# Altium PCB MI_06_MCU_Rev_3_0.PcbDoc
Units mm, origin at the board's own origin, x right, y up, seen from the top; angles counter-clockwise.
Board outline 64.5 x 65 mm, 2 copper layers (Top Layer, Bottom Layer), stack 2.071 mm thick; 43 components, 27 nets, 143 pads, 0 vias.
Unrouted connection lines stored in the file: 6.
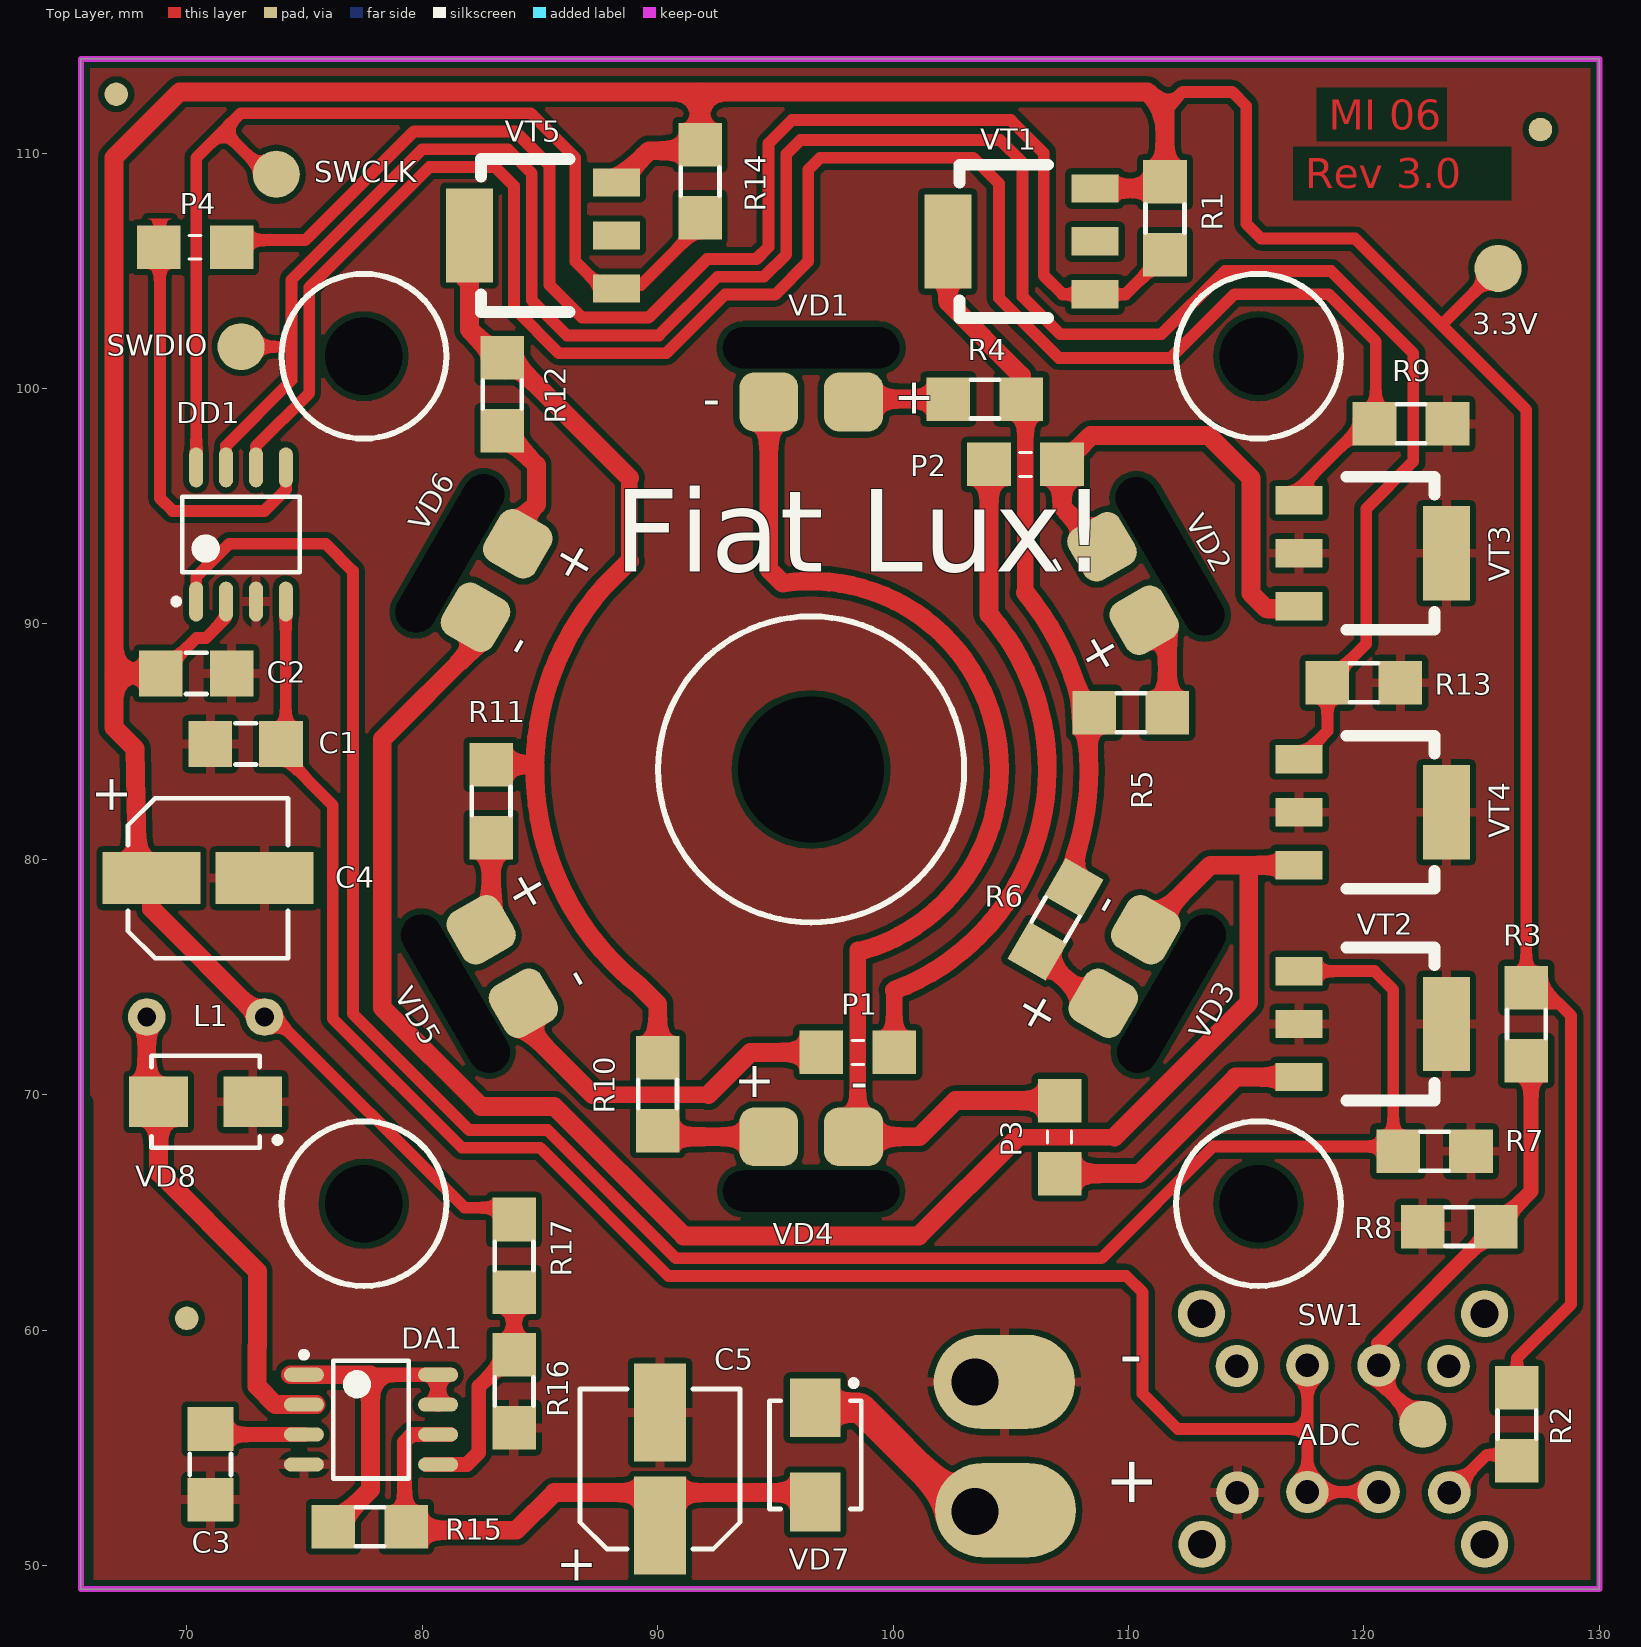
[diagram p0: Top Layer view]
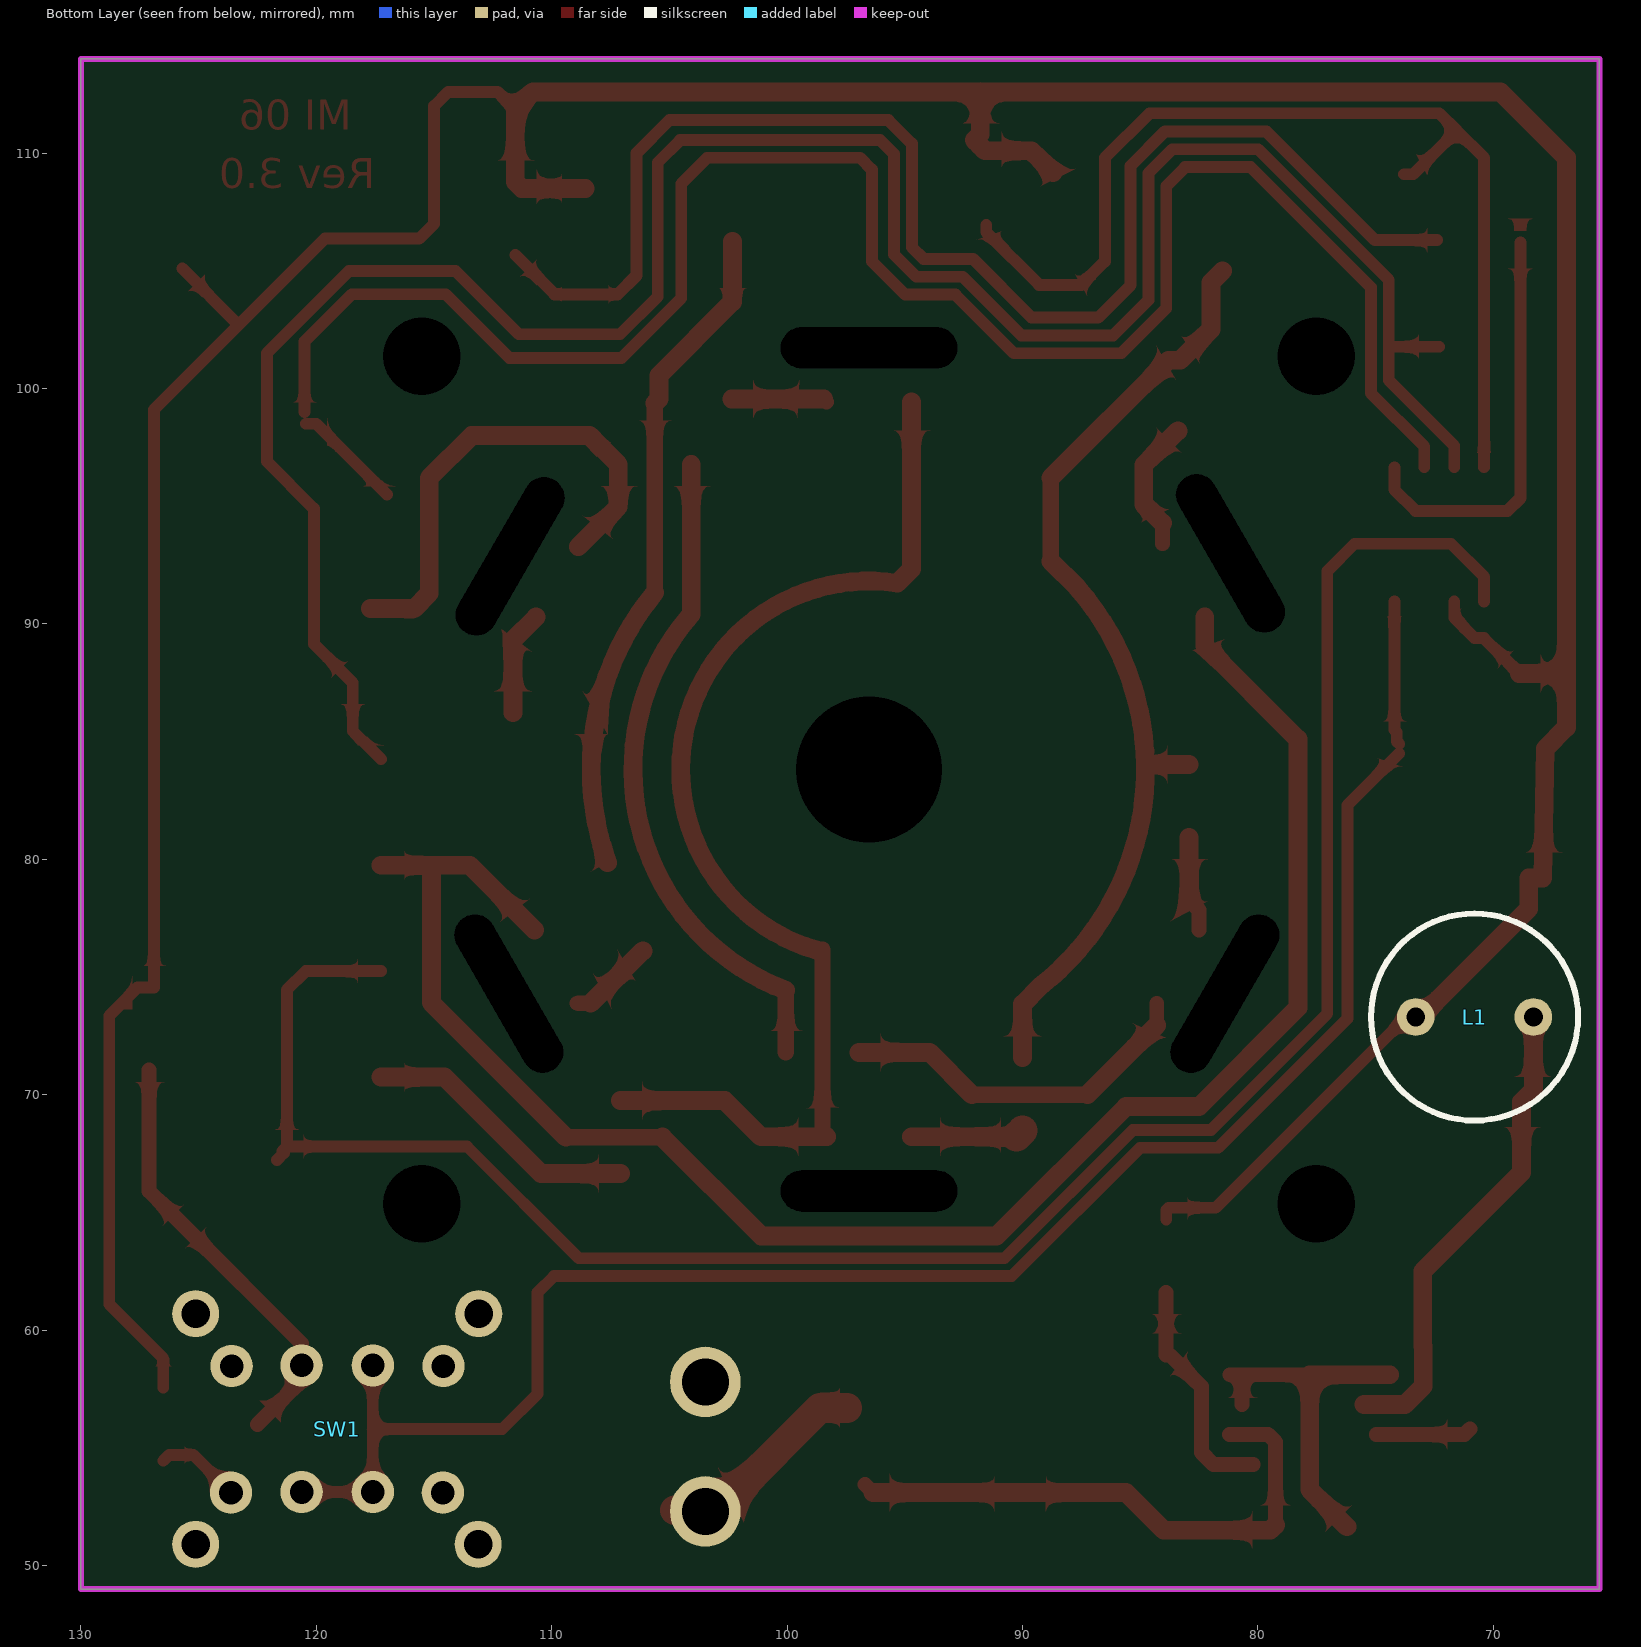
[diagram p1: Bottom Layer view, seen from below]
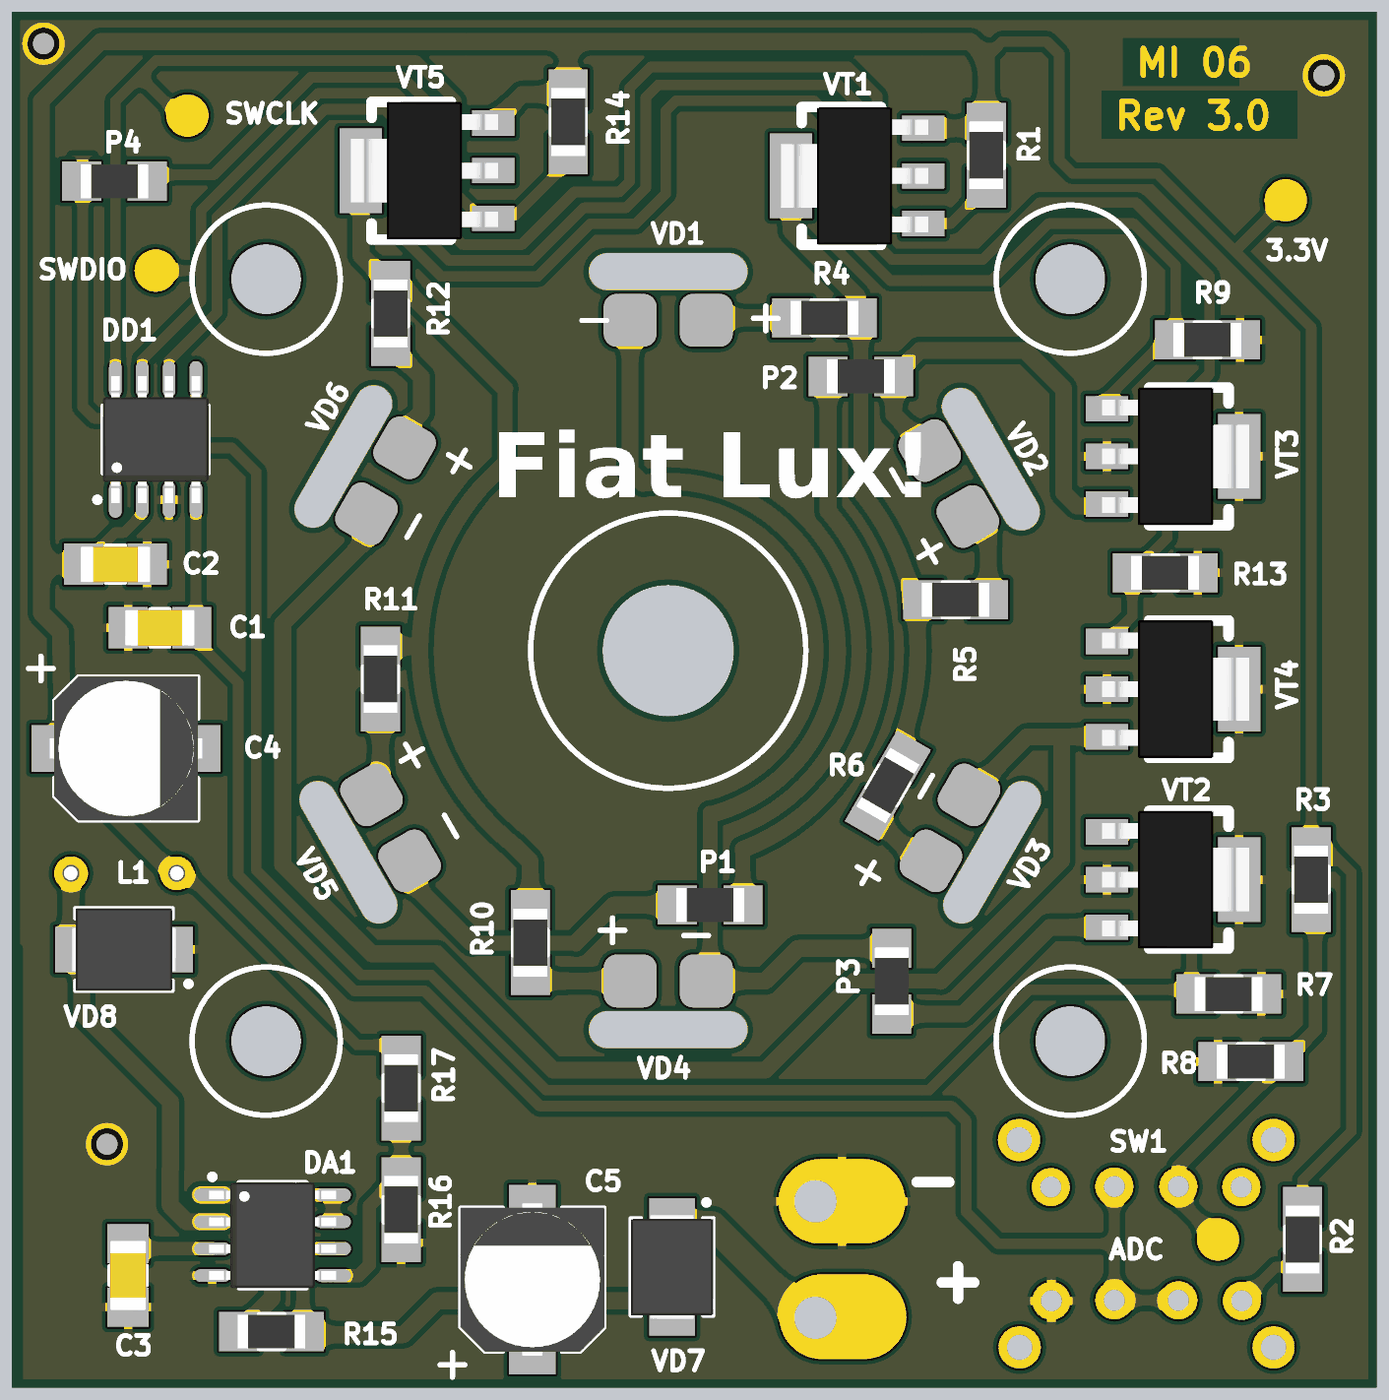
[diagram p2: 3D render of the assembled board from above, using the file's embedded part models]

## Layer stack, top to bottom
Top Solder: solder mask 0.0102, Solder Resist, Dk 3.5
Top Layer: signal copper 0.0356
Dielectric 1: dielectric 2, FR-4, Dk 4.8
Bottom Layer: signal copper 0.0356
Bottom Solder: solder mask 0.0102, Solder Resist, Dk 3.5

## Board outline
65.5,49 130,49 130,114 65.5,114

## Design rules (kind name [scope] priority, off if disabled: settings)
Clearance [All] p1: gap=0.254 ignorepadtopadclearanceinfootprint=FALSE except(0: Arc-Hole Track-Hole SMDPad-Hole THPad-Hole Via-Hole Fill-Hole Poly-Hole Region-Hole Text-Hole; 0.076: SMDPad-SMDPad SMDPad-THPad SMDPad-Via)
ComponentClearance [All] p1: gap=0.001 collisioncheckmode=3 verticalgap=0.254 showdistances=FALSE
PolygonConnect [All] p1: connectstyle=Relief reliefconductorwidth=0.4 reliefentries=4 polygonreliefangle="90 Angle" airgapwidth=0.254
RoutingVias [All] p1: holewidth=0.711 width=1.27 viastyle="Through Hole" minholewidth=0.711 minwidth=1.27 maxholewidth=0.711 maxwidth=1.27
SolderMaskExpansion [All] p1: expansion=0.102
Width [All] p1: maxlimit=2.54 minlimit=0.025 preferedwidth=0.8 checkconnectedcopper=TRUE
29 further rules are at their usual default settings.

## Classes and differential pairs
component class MI_06_07_08_MCU_Rev_3_0: C1 C2 C3 C4 C5 DA1 DD1 L1 R1 R2 R3 R4 R5 R6 R7 R8 R9 R10 R11 R12 R13 R14 R15 R16 R17 SW1 VD1 VD2 VD3 VD4 VD5 VD6 VD7 VD8 VT1 VT2 VT3 VT4 VT5

## Components (designator, comment, footprint, x,y, rotation, side; value= is the part's Value field where it differs from the comment)
C1 "Capacitor" CAP1206 72.5,84.9 r0 top value="0.1 uF"
C2 "Capacitor" CAP1206 70.4,87.9 r180 top value="0.1 uF"
C3 "Capacitor" CAP1206 71,54.3 r90 top value="470 pF"
C4 "Capacitor_Polar" CAP6.3x7.7 70.9,79.2 r0 top value=100uF
C5 "Capacitor_Polar" CAP6.3x7.7 90.1,54.1 r90 top value=100uF
DA1 "MC34063" SOIC-8 77.825,56.2 r0 top value=MC34063ACD-TR
DD1 "STM32G030J6" SOIC-8 72.3,93.8 r90 top
L1 "inductor" inductor0912 70.8,73.3 r0 bottom value="RLB0914-221KL, 220 uH"
P1 "Comment" RES1206 98.5,71.8 r0 top
P2 "Comment" RES1206 105.625,96.775 r0 top
P3 "Comment" RES1206 107.075,68.2 r90 top
P4 "Comment" RES1206 70.35,106 r0 top
R1 "Resistor" RES1206 111.55,107.225 r90 top value="10 kOm"
R2 "Resistor" RES1206 126.5,56 r270 top value="10 kOm"
R3 "Resistor" RES1206 126.9,73 r270 top value="10 kOm"
R4 "Resistor" RES1206 103.9,99.55 r180 top value="5.1 Om"
R5 "Resistor" RES1206 110.1,86.225 r0 top value="5.1 Om"
R6 "Resistor" RES1206 106.9,77.45 r240 top value="5.1 Om"
R7 "Resistor" RES1206 123,67.6 r0 top value="10 kOm"
R8 "Resistor" RES1206 124.05,64.4 r180 top value="10 kOm"
R9 "Resistor" RES1206 122,98.5 r0 top value="10 kOm"
R10 "Resistor" RES1206 90,70.025 r90 top value="5.1 Om"
R11 "Resistor" RES1206 82.925,82.475 r90 top value="5.1 Om"
R12 "Resistor" RES1206 83.4,99.75 r90 top value="5.1 Om"
R13 "Resistor" RES1206 120,87.5 r0 top value="10 kOm"
R14 "Resistor" RES1206 91.8,108.8 r90 top value="10 kOm"
R15 "Resistor" RES1206 77.775,51.65 r0 top value="0.33 Om"
R16 "Resistor" RES1206 83.9,57.4 r270 top value="10 kOm"
R17 "Resistor" RES1206 83.9,63.15 r90 top value="16 kOm"
SW1 "slide switch" "SLIDE SWITCH" 119.1,55.8 r180 bottom
VD1 "LED" LED_MAJAK 96.52,101.727 r0 top
VD2 "LED" LED_MAJAK 111.767,92.866 r300 top
VD3 "LED" LED_MAJAK 111.825,74.295 r240 top
VD4 "LED" LED_MAJAK 96.52,65.913 r180 top
VD5 "LED" LED_MAJAK 81.407,74.295 r120 top
VD6 "LED" LED_MAJAK 81.17,92.995 r60 top
VD7 "Diode" SMB 96.7,54.7 r270 top value=SS210
VD8 "Diode" SMB 70.8,69.7 r180 top value=SS210
VT1 "MOSFET-P" SOT223 105.325,106.25 r90 top value=IRFL9014TRPBF
VT2 "MOSFET-N" SOT223 120.5,73 r270 top value=IRLL024NPBF
VT3 "MOSFET-N" SOT223 120.5,93 r270 top value=IRLL024NPBF
VT4 "MOSFET-N" SOT223 120.5,82 r270 top value=IRLL024NPBF
VT5 "MOSFET-P" SOT223 85,106.5 r90 top value=IRFL9014TRPBF

## Footprints (in the part's own frame and the unit in brackets; to place one, negate y for a bottom-side part, rotate by r counter-clockwise, add the part's x,y. Pads: shape width x height; smd on the part's side, far side on the other; paste and mask are expansions set on the pad)
CAP6.3x7.7 [mm]
  rect 4.15x2.2 smd: 1(-2.4,0) 2(2.4,0)
  silkscreen extent -3.4,-3.4 3.4,3.4, body extent -3.6,-3.4 3.6,3.4, height 7.7
CAP1206 [mm]
  rect 1.85x1.95 smd: 1(-1.5,0) 2(1.5,0)
  silkscreen extent -0.45,-0.87 0.45,0.87, body extent -1.65,-0.85 1.65,0.85, height 1.5
inductor0912 [mm]
  round 1.6 hole 0.8: 1(-2.5,0) 2(2.5,0)
  silkscreen extent -4.4,-4.4 4.4,4.4, body extent -4.35,-4.35 4.35,4.35, height 11
LED_MAJAK [mm]
  round 0 hole 1.75 slot 7.5 at 0 deg: 0(0,0)
  rrect50% 2.5x2.5 smd: 1(-1.8,-2.3) 2(1.8,-2.3)
RES1206 [mm] "Chip Resistor, 2-Leads, Body 3,20x1,60mm, IPC Medium Density"
  rect 1.85x1.85 smd: 1(-1.55,0) 2(1.55,0)
  silkscreen extent -0.25,-0.51 0.25,0.51, body extent -1.6,-0.8 1.6,0.8, height 0.6
"SLIDE SWITCH" [mm]
  round 2 hole 1.2: 0(-6.025,4.9) 0(-6.025,-4.9) 0(5.975,-4.9) 0(6,4.9)
  round 1.8 hole 1: 1(-4.525,-2.7) 2(-1.525,-2.675) 3(1.5,-2.675) 4(4.475,-2.7) 5(4.5,2.675) 6(1.5,2.7) 7(-1.525,2.7) 8(-4.5,2.675)
  body extent -6.9,-5 6.9,5, height 16
SMB [mm] "Molded Diode, 2-Leads, Body 4,29x3,60mm, IPC Medium Density"
  rect 2.5x2.15 smd: 1(-2,0) 2(2,0)
  silkscreen extent -3.17,-1.95 2.3,1.95, body extent -2.5,-1.95 2.51,1.95, height 2.2
SOIC-8 [mm] "SOIC, 8-Leads, Body 4,90x3,90mm, Pitch 1,27mm, IPC Medium Density"
  oval 1.7x0.6 smd: 1(-2.85,1.905) 2(-2.85,0.635) 3(-2.85,-0.635) 4(-2.85,-1.905) 5(2.85,-1.905) 6(2.85,-0.635) 7(2.85,0.635) 8(2.85,1.905)
  silkscreen extent -2.97,-2.5 1.6,2.88, body extent -3,-2.5 3,2.5, height 1.75
SOT223 [mm]
  rect 1.2x2 smd: 1(-2.25,-3.25) 2(0,-3.25) 3(2.25,-3.25)
  rect 4x2 smd: 2(0,3)
  silkscreen extent -3.25,-1.25 3.25,2.5, body extent -3.25,-3.48 3.25,3.48, height 1.7

## Free pads (board coordinates)
  round 0 / inner round 3.3 / far side round 0 hole 3.3 unplated mask-25.4: 0(77.52,65.37) 0(77.52,101.37) 0(115.52,65.37) 0(115.52,101.37)
  round 0 hole 6.2 unplated: 0(96.52,83.82)
  round 1 smd: 5(67,112.5) 5(70,60.5) 5(127.5,111)
  round 2 on Top Solder: 7(67,112.5) 7(70,60.5) 7(127.5,111)
  oval 6x4 smd paste-5: 11(104.725,57.8) 11(104.775,52.35)
  round 2 smd paste-3: 12(72.304,101.777) 12(73.8,109.1) 12(122.5,56) 12(125.7,105.1)
  round 3 hole 2: 13(103.475,52.3) 13(103.475,57.8)

## Nets (pads, with @x,y where several pads share a name; then routed paths per layer and width w, separated by ;. In a path a pad name is that pad's centre, name@x,y a point inside that pad or via, vN(x,y) a via of type N, cw(c..) or ccw(c..) an arc to the next point about the centre after c; other vN are vias at no path point)
3.3V: C2.2 C4.1 DD1.2 L1.2 pad.12@125.7,105.1 R1.2 R2.1 R3.1 R14.2 R17.2 VT1.3 VT5.3 | length 190.1
  Top Layer w0.5: C2.2 70.4,89.4 70.8,89.4 71.665,90.265 DD1.2 ; L1.2@73.1,73.3 L1.2 73.7,73.3 81.8,65.2 83.8,65.2 83.9,65.1 R17.2 ; 111.55,111.85 112.3,112.6 114.4,112.6 115,112 115,107 115.633,106.367 119.633,106.367 123.25,102.75 ; pad.12@125.7,105.1 123.35,102.75 123.25,102.75 ; R2.1 126.5,58.8 128.8,61.1 128.8,73.35 127.6,74.55 R3.1 126.9,99.1 123.25,102.75
  Top Layer w0.8: C2.2 66.9,87.9 ; L1.2@73.1,73.3 68.5,77.9 C4.1 67.9,79.2 67.8,84.7 66.9,85.6 66.9,87.9 ; VT5.3@88.7,109.175 89.625,110.1 91.6,110.1 91.825,110.325 92.05,110.55 91.8,110.8 91.8,112.6 ; VT1.3 111.275,108.5 R1.2 111.55,111.85 110.8,112.6 91.8,112.6 ; 66.9,87.9 66.9,109.8 69.7,112.6 91.8,112.6
12V: pad.11@104.775,52.35 pad.13@103.475,52.3 VD7.1 | length 8.7
  Top Layer w1.27: VD7.1@97.45,56.7 98.6,56.7 102.25,53.05 pad.13@103.45,53.05 ; pad.13@103.55,52.35 pad.13@104.775,52.35
GND: C1.1 C2.1 C3.1 C4.2 C5.2 DA1.4 DD1.3 pad.11@104.725,57.8 pad.13@103.475,57.8 R7.2 R8.2 R9.2 R13.2 R16.2 SW1.4 VD8.1 VT2.2 VT3.2 VT4.2
NetC1_2: C1.2 DD1.4 SW1.2 SW1.3 SW1.6 | length 77.9
  Top Layer w0.5: C1.2@74,84.5 76.2,82.3 76.2,73.234 81.688,67.746 85.009,67.746 90.455,62.3 109.9,62.3 110.6,61.6 110.6,57.3 112.1,55.8 117.6,55.8 ; C1.2 74.1,85 74.1,85.4 74.205,85.505 DD1.4 ; SW1.6 117.6,55.8 ; SW1.2 SW1.3 117.6,55.8
NetC3_2: C3.2 DA1.3 | length 4.1
  Top Layer w0.635: C3.2 71.235,55.565 DA1.3
NetC5_1: C5.1 DA1.6 R15.2 VD7.2 | length 24
  Top Layer w0.635: R15.2@79.253,51.722 79.253,55.253 79.565,55.565 DA1.6 DA1.6@81.2,55.565 ; VD7.2@96.35,53.1 VD7.2@96.7,53.45
  Top Layer w0.8: R15.2@79.253,51.722 R15.2 79.475,51.5 84,51.5 85.6,53.1 VD7.2@96.35,53.1
NetDA1_1: DA1.1 DA1.7 DA1.8 R15.1 | length 15.2
  Top Layer w0.635: 77.8,58.105 DA1.8 ; DA1.7 DA1.8 ; DA1.8@81.195,58.105 DA1.8
  Top Layer w0.8: DA1.1@74.4,58.105 DA1.1 77.8,58.105 77.8,53.225 R15.1
NetDA1_2: DA1.2 L1.1 VD8.2 | length 20.5
  Top Layer w0.8: L1.1 68.3,70.2 VD8.2 68.8,66.7 73,62.5 73,59.3 72.981,59.319 72.981,57.619 73.765,56.835 DA1.2 DA1.2@75.5,56.835
NetDA1_5: DA1.5 R16.1 R17.1 | length 9.9
  Top Layer w0.635: DA1.5@80.2,54.295 DA1.5 81.895,54.295 82.4,54.8 82.4,57.6 83.75,58.95 R16.1 R17.1
NetDD1_1: DD1.1 R7.1 VT2.1 | length 89.6
  Top Layer w0.5: DD1.1 70.395,91.995 71.8,93.4 75.9,93.4 77.054,92.246 77.054,73.446 82,68.5 85.322,68.5 90.768,63.054 108.854,63.054 113.6,67.8 R7.1@121.1,67.8 ; VT2.1 119.65,75.25 120.45,75.25 121.25,74.45 121.25,67.8 R7.1 ; R7.1@121.375,67.525 R7.1@121.675,67.225
NetDD1_5: DD1.5 P4.1 P4.2 R1.1 VT1.1 | length 77.9
  Top Layer w0.508: P4.1@68.85,106.2 68.85,95.35 69.4,94.8 73.3,94.8 74.205,95.705 DD1.5 ; P4.2@72.4,106.3 75.028,106.3 79.644,110.916 83.956,110.916 85.412,109.46 85.412,104.388 86.788,103.012 89.612,103.012 92.1,105.5 94.2,105.5 94.7,106 94.7,110.4 95.7,111.4 105,111.4 106.4,110 106.4,104.8 107.2,104 VT1.1 109.875,104 R1.1
NetDD1_6: DD1.6 R9.1 VT3.1 | length 84.1
  Top Layer w0.5: DD1.6 72.935,97.538 75.2,99.803 75.2,104.3 80.304,109.404 83.096,109.404 83.9,108.6 83.9,103.4 85.8,101.5 90.366,101.5 92.854,103.988 94.988,103.988 96.4,105.4 96.4,109.3 96.9,109.8 103.4,109.8 104.5,108.7 104.5,103.834 107.034,101.3 111.8,101.3 114.5,104 118.5,104 120.5,102 R9.1@120.5,99 ; VT3.1@117,95.5 120,98.5 R9.1
NetDD1_7: DD1.7 pad.12@72.304,101.777 R13.1 VT4.1 | length 102.2
  Top Layer w0.5: DD1.7 71.665,97.565 74.446,100.346 74.446,101.9 ; pad.12@72.304,101.777 74.323,101.777 74.446,101.9 ; VT4.1 118.45,85.45 R13.1 120.1,89.15 120.1,94.9 122.1,96.9 122.1,101.5 118.614,104.986 114.086,104.986 111.4,102.3 107.1,102.3 105.5,103.9 105.5,109.6 104.546,110.554 96.054,110.554 95.458,109.958 95.458,105.686 94.514,104.742 92.542,104.742 90.054,102.254 86.146,102.254 84.654,103.746 84.654,109.146 83.642,110.158 79.992,110.158 74.446,104.612 74.446,101.9
NetDD1_8: DD1.8 pad.12@73.8,109.1 R14.1 VT5.1 | length 44.9
  Top Layer w0.5: DD1.8 70.395,109.795 71.55,110.95 ; pad.12@73.8,109.1 73.4,109.1 71.55,110.95 ; R14.1@91.542,106.942 91.542,106.642 89.3,104.4 87.496,104.4 86.5,105.396 86.5,109.8 84.604,111.696 72.296,111.696 71.55,110.95
NetR2_2: R2.2 SW1.1 | length 3.6
  Top Layer w0.5: SW1.1 125.225,54.7 126.25,54.7 R2.2
NetR3_2: pad.12@122.5,56 R3.2 R8.1 SW1.7 | length 18.5
  Top Layer w0.635: pad.12@122.5,56 120.625,57.875 SW1.7 120.625,59.425 R8.1 127.1,65.9 R3.2@127.1,71.05
NetR4_1: R4.1 R5.1 R6.1 VT1.2 | length 28.5
  Top Layer w0.7: 105.624,91.329 R4.1@105.624,99.376
  Top Layer w0.8: VT1.2@102.325,106.25 102.325,103.675 105.45,100.55 R4.1 R4.1@105.624,99.376 ; 105.624,91.329 cw(c96.52,83.82) R6.1@107.635,79.852
NetR4_2: R4.2 VD1.2 | length 4.1
  Top Layer w0.635: VD1.2 VD1.2@98.443,99.55
  Top Layer w0.8: VD1.2@98.443,99.55 R4.2
NetR5_2: R5.2 VD2.2 | length 4.5
  Top Layer w0.8: VD2.2@110.668,90.286 111.65,89.304 R5.2
NetR6_2: R6.2 VD3.2 | length 3.7
  Top Layer w0.635: VD3.2@108.347,73.886 VD3.2
  Top Layer w0.8: R6.2 VD3.2@108.347,73.886
NetR10_1: R10.1 VD4.2 | length 4.8
  Top Layer w0.8: R10.1@90.262,68.213 VD4.2
  Top Layer w1.27: R10.1 R10.1@90.262,68.213
NetR10_2: R10.2 R11.2 R12.2 VT5.2 | length 41.5
  Top Layer w0.635: 84.758,84.025 84.782,84.001
  Top Layer w0.7: 88.8,92.662 88.8,96.2
  Top Layer w0.8: VT5.2@81.5,105 82,104.5 82,102.5 83.3,101.2 83.8,101.2 88.8,96.2 ; R11.2 84.758,84.025 ; 88.8,92.662 87.665,91.527 ccw(c96.52,83.82) 84.782,84.001 ccw(c96.52,83.82) 89.247,74.605 90,73.852 R10.2
NetR11_1: R11.1 VD5.2 | length 4.1
  Top Layer w0.635: VD5.2 82.499,77.849 VD5.2@82.925,78.275
  Top Layer w0.8: VD5.2@82.925,78.275 R11.1
NetR12_1: R12.1 VD6.2 | length 5.7
  Top Layer w0.635: VD6.2 VD6.2@84.062,94.287
  Top Layer w0.8: R12.1 84.85,96.75 84.85,95.075 VD6.2@84.062,94.287
NetVD1_1: P3.1 P3.2 VD1.1 VD4.1 VT2.3 | length 61.3
  Top Layer w0.7: VD4.1@98.498,68.391 98.498,76.15
  Top Layer w0.8: VD1.1 94.72,92.329 95.319,91.729 cw(c96.52,83.82) 98.764,76.141 ; VD4.1@98.498,68.391 VD4.1 101.113,68.213 102.65,69.75 P3.2 ; P3.1 110.45,66.65 114.55,70.75 VT2.3
NetVD2_1: P1.1 P1.2 P2.1 P2.2 VD2.1 VD5.1 VT3.3 | length 65
  Top Layer w0.635: VD5.1@84.299,72.949 VD5.1
  Top Layer w0.7: 87.244,70.004 92.154,70.004 ; P1.2 100.05,74.426 100.059,74.434 ; 104.075,90.402 104.174,90.303
  Top Layer w0.8: VD5.1@84.299,72.949 87.244,70.004 ; 92.154,70.004 93.95,71.8 P1.1 ; 100.059,74.434 ccw(c96.52,83.82) 104.174,90.303 ; 104.075,90.402 P2.1 ; VD2.1 107.175,94.975 P2.2 108.4,98 113.4,98 115.2,96.2 115.2,91.3 115.85,90.65 VT3.3@117.7,90.65
NetVD3_1: VD3.1 VD6.1 VT4.3 | length 76.6
  Top Layer w0.7: 105.3,68.2 109.4,68.2
  Top Layer w0.8: VD6.1 82.262,89.062 78.304,85.104 78.304,73.696 82.5,69.5 85.6,69.5 91.1,64 101.1,64 105.3,68.2 ; 109.4,68.2 115.112,73.912 115.112,79.7 ; VD3.1 113.479,79.75 VT4.3
pads on no net: SW1.0 SW1.5 SW1.8 VD1.0 VD2.0 VD3.0 VD4.0 VD5.0 VD6.0

## Polygon pours and split planes (outlines as drawn)
GND on Top Layer "Bottom Layer-No Net 1" (solid, pour order 0): 65.5,49 65.5,114 130,114 130,49

## Keep-outs
Keep-Out Layer:
  lines w0.254: 65.5,49 65.5,61.991 65.5,69.842 65.5,114 130,114 130,49 65.5,49

## Other copper
Top Layer:
  text "MI 06" at 118.5,111 h1.27
  text "Rev 3.0" at 117.5,108.5 h1.27

## Silkscreen, mask and mechanical layers (free items; w line width, h text height)
Top Overlay:
  circle w0.254: c96.52,83.82 r6.5
  circle w0.254: c115.52,65.37 r3.5
  circle w0.254: c77.52,65.37 r3.5
  circle w0.254: c115.52,101.37 r3.5
  circle w0.254: c77.52,101.37 r3.5
  text "SWCLK" at 75.416,108.77 h0.9
  text "3.3V" at 124.6,102.3 h0.9
  text "SWDIO" at 66.6,101.4 h0.9
  text "Fiat Lux!" at 88.145,91.07 h6
  text "-" at 110.6,59.5 h2 r180
  text "ADC" at 117.2,55.1 h0.9
  text "+" at 111,52.4 h2 r90
Top Solder:
  region: 115.52,67.128 115.177,67.095 114.847,66.995 114.543,66.832 114.277,66.613 114.058,66.347 113.895,66.043 113.795,65.713 113.762,65.37 113.795,65.027 113.895,64.697 114.058,64.393 114.277,64.127 114.543,63.908 114.847,63.745 115.177,63.645 115.52,63.612 115.863,63.645 116.193,63.745 116.497,63.908 116.763,64.127 116.982,64.393 117.145,64.697 117.245,65.027 117.278,65.37 117.245,65.713 117.145,66.043 116.982,66.347 116.763,66.613 116.497,66.832 116.193,66.995 115.863,67.095 115.52,67.128
  region: 77.52,103.128 77.177,103.095 76.847,102.995 76.543,102.832 76.277,102.613 76.058,102.347 75.895,102.043 75.795,101.713 75.762,101.37 75.795,101.027 75.895,100.697 76.058,100.393 76.277,100.127 76.543,99.908 76.847,99.745 77.177,99.645 77.52,99.612 77.863,99.645 78.193,99.745 78.497,99.908 78.763,100.127 78.982,100.393 79.145,100.697 79.245,101.027 79.278,101.37 79.245,101.713 79.145,102.043 78.982,102.347 78.763,102.613 78.497,102.832 78.193,102.995 77.863,103.095 77.52,103.128
  region: 115.52,103.128 115.177,103.095 114.847,102.995 114.543,102.832 114.277,102.613 114.058,102.347 113.895,102.043 113.795,101.713 113.762,101.37 113.795,101.027 113.895,100.697 114.058,100.393 114.277,100.127 114.543,99.908 114.847,99.745 115.177,99.645 115.52,99.612 115.863,99.645 116.193,99.745 116.497,99.908 116.763,100.127 116.982,100.393 117.145,100.697 117.245,101.027 117.278,101.37 117.245,101.713 117.145,102.043 116.982,102.347 116.763,102.613 116.497,102.832 116.193,102.995 115.863,103.095 115.52,103.128
  region: 77.52,67.128 77.177,67.095 76.847,66.995 76.543,66.832 76.277,66.613 76.058,66.347 75.895,66.043 75.795,65.713 75.762,65.37 75.795,65.027 75.895,64.697 76.058,64.393 76.277,64.127 76.543,63.908 76.847,63.745 77.177,63.645 77.52,63.612 77.863,63.645 78.193,63.745 78.497,63.908 78.763,64.127 78.982,64.393 79.145,64.697 79.245,65.027 79.278,65.37 79.245,65.713 79.145,66.043 78.982,66.347 78.763,66.613 78.497,66.832 78.193,66.995 77.863,67.095 77.52,67.128
  text "MI 06" at 118.5,111 h1.27
  text "Rev 3.0" at 117.5,108.5 h1.27
Bottom Solder:
  region: 115.52,67.128 115.177,67.095 114.847,66.995 114.543,66.832 114.277,66.613 114.058,66.347 113.895,66.043 113.795,65.713 113.762,65.37 113.795,65.027 113.895,64.697 114.058,64.393 114.277,64.127 114.543,63.908 114.847,63.745 115.177,63.645 115.52,63.612 115.863,63.645 116.193,63.745 116.497,63.908 116.763,64.127 116.982,64.393 117.145,64.697 117.245,65.027 117.278,65.37 117.245,65.713 117.145,66.043 116.982,66.347 116.763,66.613 116.497,66.832 116.193,66.995 115.863,67.095 115.52,67.128
  region: 77.52,103.128 77.177,103.095 76.847,102.995 76.543,102.832 76.277,102.613 76.058,102.347 75.895,102.043 75.795,101.713 75.762,101.37 75.795,101.027 75.895,100.697 76.058,100.393 76.277,100.127 76.543,99.908 76.847,99.745 77.177,99.645 77.52,99.612 77.863,99.645 78.193,99.745 78.497,99.908 78.763,100.127 78.982,100.393 79.145,100.697 79.245,101.027 79.278,101.37 79.245,101.713 79.145,102.043 78.982,102.347 78.763,102.613 78.497,102.832 78.193,102.995 77.863,103.095 77.52,103.128
  region: 115.52,103.128 115.177,103.095 114.847,102.995 114.543,102.832 114.277,102.613 114.058,102.347 113.895,102.043 113.795,101.713 113.762,101.37 113.795,101.027 113.895,100.697 114.058,100.393 114.277,100.127 114.543,99.908 114.847,99.745 115.177,99.645 115.52,99.612 115.863,99.645 116.193,99.745 116.497,99.908 116.763,100.127 116.982,100.393 117.145,100.697 117.245,101.027 117.278,101.37 117.245,101.713 117.145,102.043 116.982,102.347 116.763,102.613 116.497,102.832 116.193,102.995 115.863,103.095 115.52,103.128
  region: 77.52,67.128 77.177,67.095 76.847,66.995 76.543,66.832 76.277,66.613 76.058,66.347 75.895,66.043 75.795,65.713 75.762,65.37 75.795,65.027 75.895,64.697 76.058,64.393 76.277,64.127 76.543,63.908 76.847,63.745 77.177,63.645 77.52,63.612 77.863,63.645 78.193,63.745 78.497,63.908 78.763,64.127 78.982,64.393 79.145,64.697 79.245,65.027 79.278,65.37 79.245,65.713 79.145,66.043 78.982,66.347 78.763,66.613 78.497,66.832 78.193,66.995 77.863,67.095 77.52,67.128
Mechanical 4:
  the board outline again, w0.05

## Text inside footprints (layer, text, board x,y; h text height)
C4: Top Overlay "+" at 67.471,81.867 h1.52 r90
C5: Top Overlay "+" at 87.433,50.671 h1.52 r180
VD1: Top Overlay "-" at 91.92,98.827 h1.52; Top Overlay "+" at 100.02,98.927 h1.52
VD2: Top Overlay "-" at 106.3,92.525 h1.52 r300; Top Overlay "+" at 107.8,89.175 h1.52 r300
VD3: Top Overlay "-" at 108.75,78.675 h1.52 r240; Top Overlay "+" at 106,74.575 h1.52 r240
VD4: Top Overlay "-" at 98.95,70.95 h1.52 r180; Top Overlay "+" at 95,71.2 h1.52 r180
VD5: Top Overlay "-" at 87.3,74.875 h1.52 r120; Top Overlay "+" at 85.475,78.225 h1.52 r120
VD6: Top Overlay "-" at 84.425,88.425 h1.52 r60; Top Overlay "+" at 86.6,91.525 h1.52 r60